# EAGLE board PT_2015_PB_MAIN_Rev2.5_order (EAGLE 6.5.0)
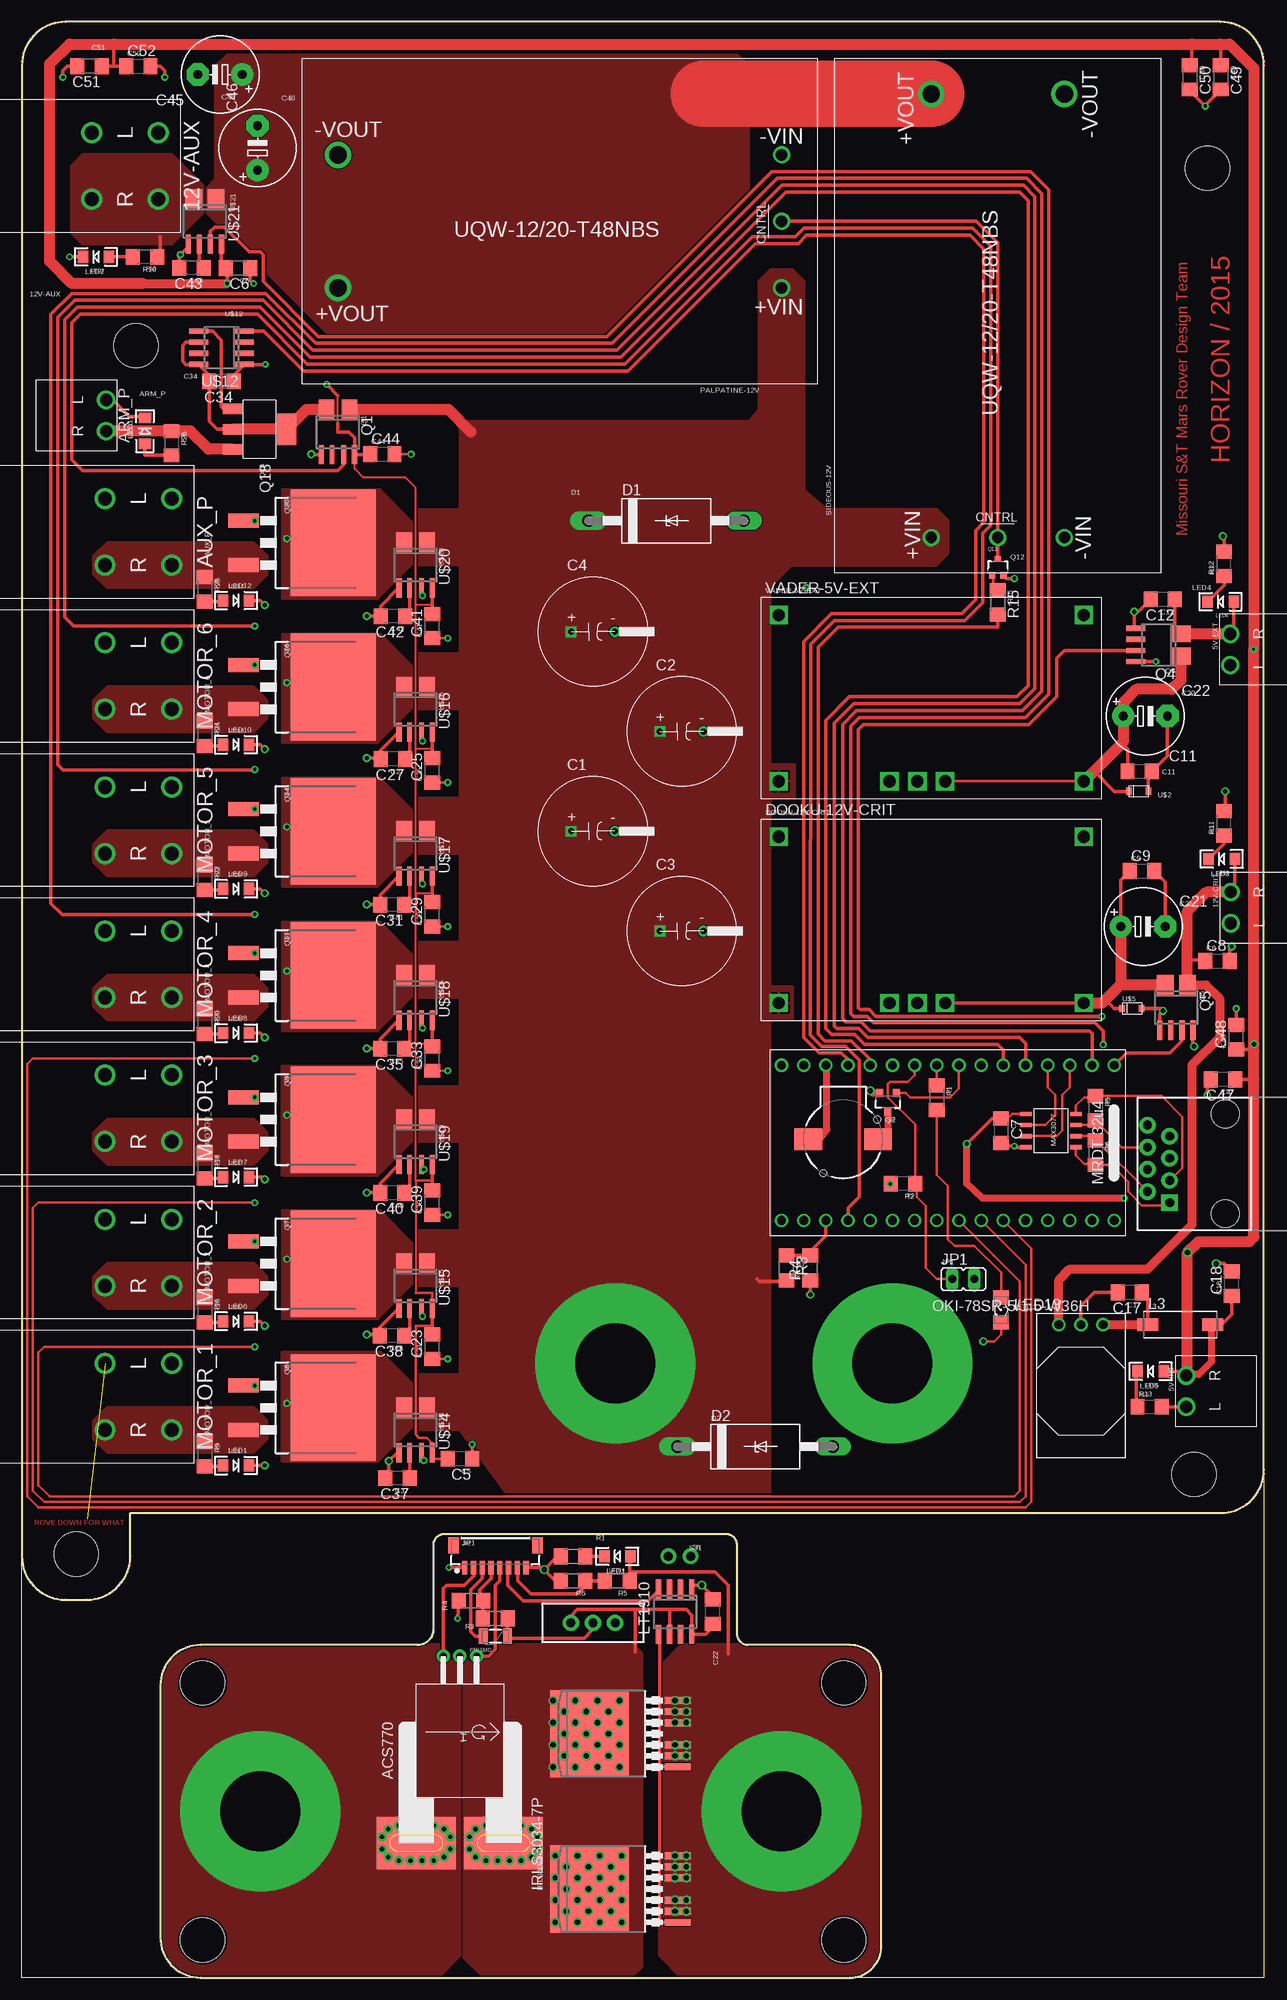
[diagram p0: board, top side]
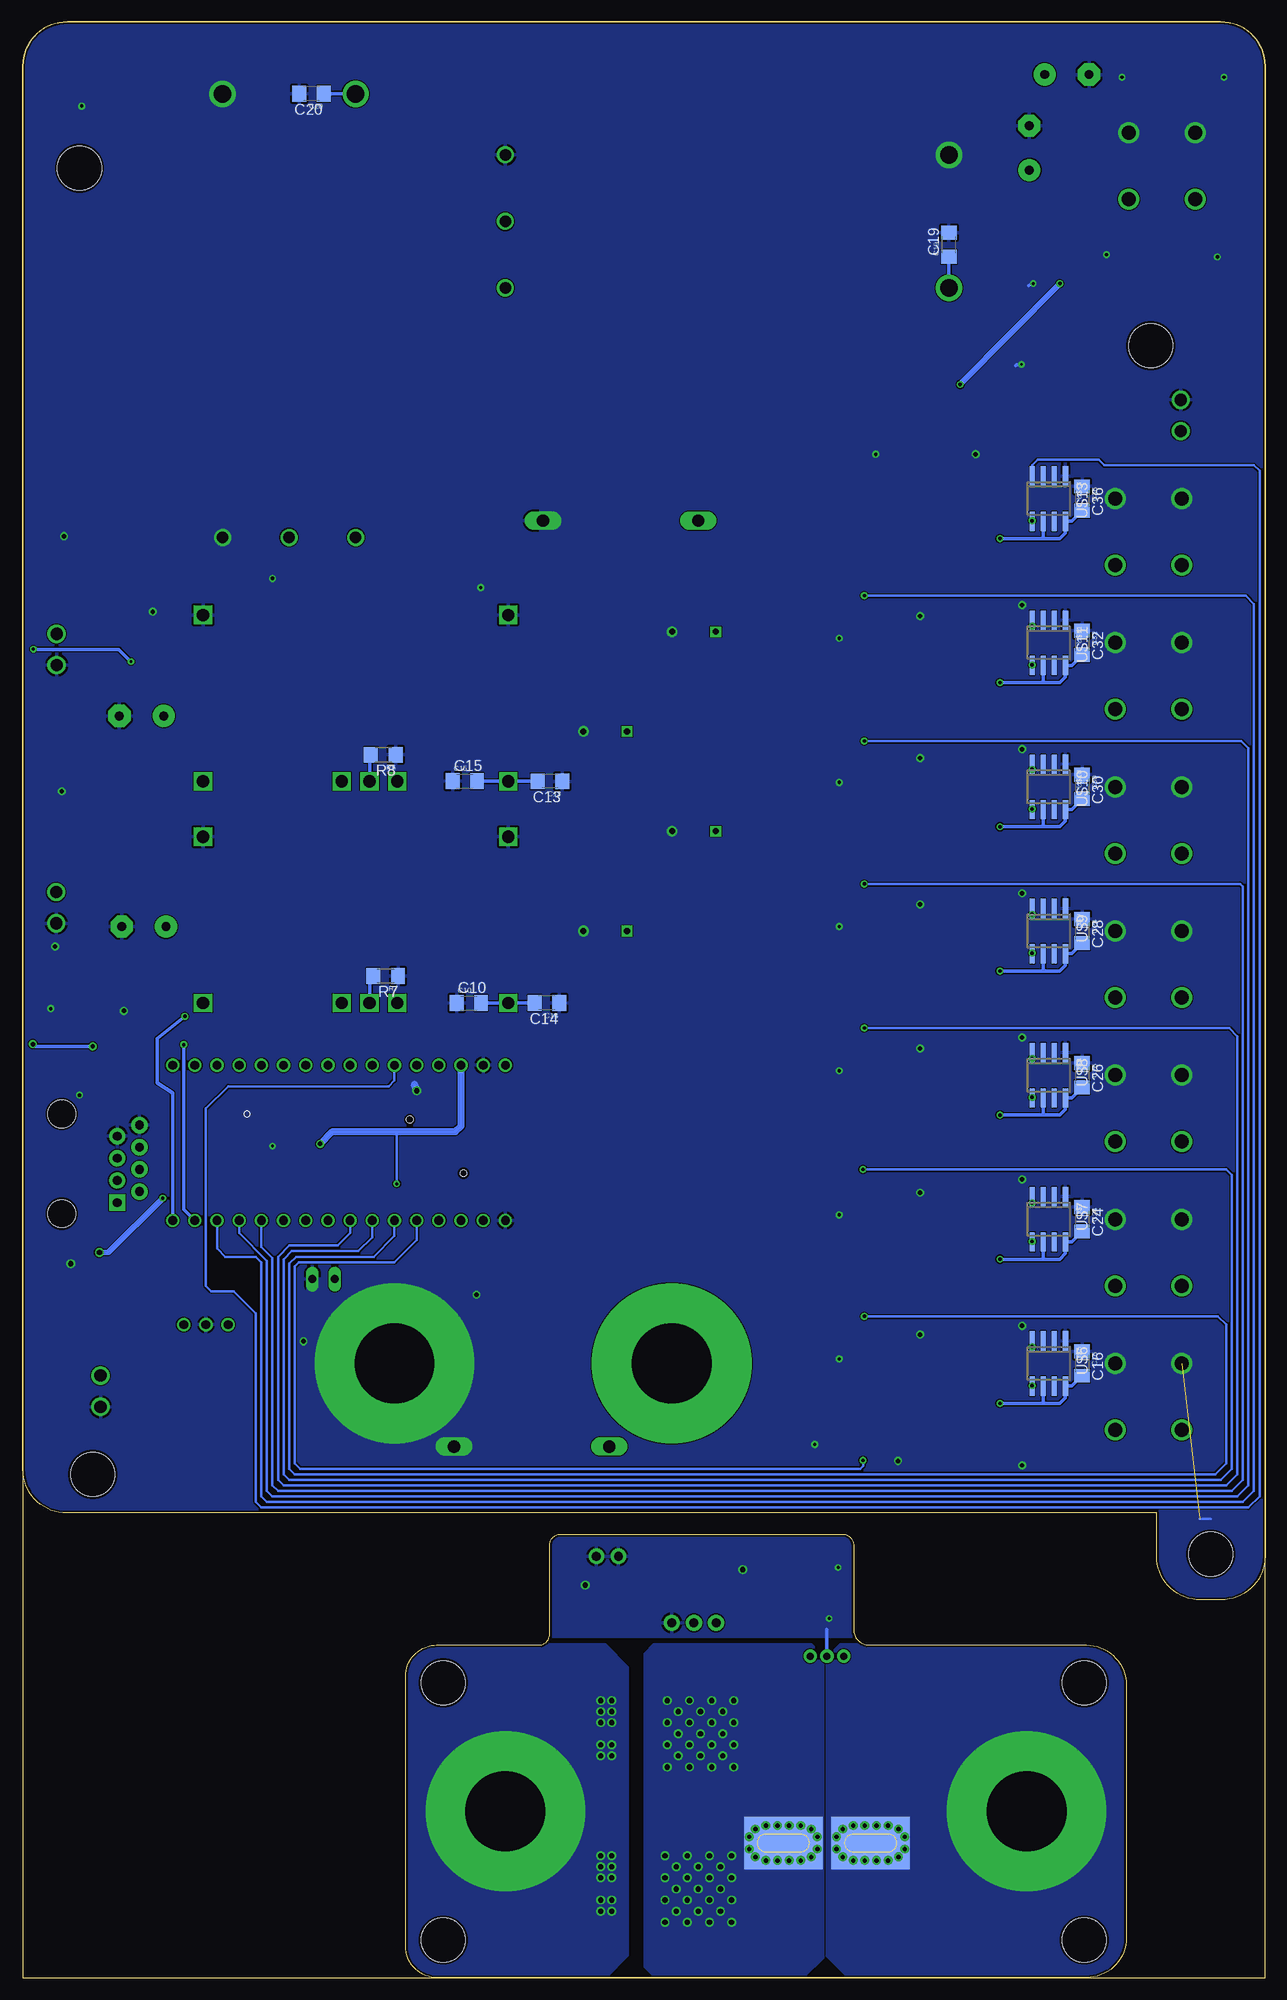
[diagram p1: board, bottom side, seen from below]

Size 142.24 x 224.03 mm. Coordinates in mm from the lower left corner, seen from the top.
Outline: 12.42,53.21 137.24,53.21 arc90 142.24,58.21 142.24,219.03 arc90 137.24,224.03 5,224.03 arc90 0,219.03 0,48.28 arc90 5,43.28 7.42,43.28 arc90 12.42,48.28 12.42,53.21
Outline: 20.45,0 94.83,0 arc90 98.43,3.59 98.43,34.51 arc90 94.83,38.1 83.19,38.1 arc-90 81.91,39.37 81.91,49.53 arc90 80.65,50.8 48.39,50.8 arc90 47.12,49.53 47.12,39.9 arc-90 45.32,38.1 20.45,38.1 arc90 15.88,33.52 15.88,4.58 arc90 20.45,0
Outline: 0,0 0,218.95 arc-90 5.08,224.03 137.16,224.03 arc-90 142.24,218.95 142.24,0 0,0
Copper layers (1*16): Top 0.035559375mm / dielectric 1.501140625mm / Bottom 0.035559375mm
Design rules "typical_4pcb *": minimum track width 5mil, minimum drill 10mil, track to track 5mil, track to pad 5mil, pad to pad 5mil, via to via 5mil, smd to smd 5mil, copper to edge 10mil, drill to drill 5mil, minimum pad ring 10mil, minimum via ring 8mil, stop-mask expansion 4mil, vias tented up to drill 0mil, thermal gap 10mil
Holes 5.08 mm at 13.08,186.94 135.76,207.26 134.24,57.66 6.22,48.51 20.7,33.78 20.7,4.32 94.11,33.78 94.11,4.32

## Footprints (pad centres in the part's own frame; a part is rotated, then mirrored left to right if it is on the bottom)
691322110002 = drill 1.4: L -1.79,0; R 1.79,0
20020618-M02 = drill 1.6: L1 -3.81,3.81; L2 -3.81,-3.81; R1 3.81,3.81; R2 3.81,-3.81
LARGE_TERMINAL_HOLE = drill 9.144 pad 18.288: P$1 0,0
C_12.5MM = drill 0.7 square: + -2.5,0 | drill 0.7: - 2.5,0
C1206 = smd 1.6 x 1.8: 1 -1.4,0; 2 1.4,0
E5-8,5 = drill 1.016 pad 2.54: + -2.54,0 | drill 1.016 pad 2.54 octagon: - 2.54,0
CB429-17 = drill 1.397 long: A 8.89,0; C -8.89,0
R_PDSS-T7 = drill 1.4 square: 1 -17.47,9.53; 2 -17.47,-9.52; 3 -4.77,-9.52; 4 -1.59,-9.52; 5 1.59,-9.52; 6 17.47,-9.52; 7 17.47,9.53
PTC-1206 = smd 1 x 1.8: 1 -1.4,0; 2 1.4,0
D2PAK-7 = smd 0.8 x 3: 1 -3.81,-9.207; 2 -2.54,-9.207; 3 -1.27,-9.207; 4 1.27,-9.207; 5 2.54,-9.207; 6 3.81,-9.207 | smd 10 x 9: PAD 0,0.895
JP1 = drill 0.914 long: 1 0,-1.27; 2 0,1.27
BM08B-SRSS-TB = smd 0.6 x 1.55: 1 -3.5,0; 2 -2.5,0; 3 -1.5,0; 4 -0.5,0; 5 0.5,0; 6 1.5,0; 7 2.5,0; 8 3.5,0 | smd 1.2 x 1.8: P$9 4.8,2.525; P$10 -4.8,2.525
L8530M = smd 2.4 x 1.4: 1 -3.7,0; 2 3.7,0
LED-1206 = smd 1.2 x 1.4: A -1.5,0; C 1.5,0
FKIT-LED-1206 = smd 1.6 x 1.803: A -1.422,0; C 1.422,0
OKI-78SRH = drill 1.016: 1 2.54,0; 2 0,0; 3 -2.54,0
U-T48-QB-NO_TRIM = drill 1.3: 1 -25.4,7.62; 2 -25.4,0; 3 -25.4,-7.62 | drill 2: 4 25.4,-7.62; 8 25.4,7.62
SOIC8_ACS711_SKETCH = smd 1.8 x 2.2: 1 -1.321,-2.6; 4 1.321,-2.6 | smd 0.6 x 2.2: 5 1.905,2.6; 8 -1.905,2.6 | smd 0.55 x 2.2: 6 0.686,2.6; 7 -0.686,2.6
SOT23-3 = smd 0.8 x 0.9: 1 -0.95,-1; 2 0.95,-1; 3 0,1.1
SOIC8_ACS711 = smd 1.92 x 2.2: 1 -1.27,-2.6; 4 1.27,-2.6 | smd 0.6 x 2.2: 5 1.905,2.6; 6 0.635,2.6; 7 -0.635,2.6; 8 -1.905,2.6
D2PACK = smd 1.6 x 3.5: 1 -2.54,-8.275; 2 2.54,-8.275 | smd 12.2 x 9.75: TAB 0,2
SOT323 = smd 0.7 x 0.7: 1 -0.65,-0.925; 2 0.65,-0.925; 3 0,0.925
SOT-223 = smd 1.2 x 2.2: 1 -2.3,-3.1; 2 0,-3.1; 3 2.3,-3.1 | smd 3.6 x 2.2: 4 0,3.1
1206 = smd 1.6 x 1.8: 1 -1.4,0; 2 1.4,0
R1206 = smd 1.6 x 1.803: 1 -1.422,0; 2 1.422,0
SWITCH-SPDT = drill 1.016 pad 1.88: 1 0,2.54; 2 0,0; 3 0,-2.54
BUZZER-CCV = smd 3.2 x 2.5: + 4,0; - -4,0 | hole 0.8: -3.9,-2.25; 2.25,3.9
PTH-JUMPER-2-NO_NO_SILK = drill 1.016 pad 1.778: 1 -1.27,0; 2 1.27,0
32U4_MCU_DIP = drill 1: 1 -8.89,19.05; 2 -8.89,16.51; 3 -8.89,13.97; 4 -8.89,11.43; 5 -8.89,8.89; 6 -8.89,6.35; 7 -8.89,3.81; 8 -8.89,1.27; 9 -8.89,-1.27; 10 -8.89,-3.81; 11 -8.89,-6.35; 12 -8.89,-8.89; 13 -8.89,-11.43; 14 -8.89,-13.97; 15 -8.89,-16.51; 16 -8.89,-19.05; 17 8.89,-19.05; 18 8.89,-16.51; 19 8.89,-13.97; 20 8.89,-11.43; 21 8.89,-8.89; 22 8.89,-6.35; 23 8.89,-3.81; 24 8.89,-1.27; 25 8.89,1.27; 26 8.89,3.81; 27 8.89,6.35; 28 8.89,8.89; 29 8.89,11.43; 30 8.89,13.97; 31 8.89,16.51; 32 8.89,19.05
SOD-323 = smd 0.63 x 0.83: 1 -1.115,0; 2 1.115,0
MAX3070E = smd 0.49 x 1.3: A -1.905,2.857; B -0.635,2.857; DI 0.635,-2.857; GND 1.905,-2.857; RO -0.635,-2.857; VCC -1.905,-2.857; Y 1.905,2.857; Z 0.635,2.857
RJ45-8 = drill 1 pad 1.88 square: 1 -4.445,6.35 | drill 1 pad 1.88: 2 -3.175,8.89; 3 -1.905,6.35; 4 -0.635,8.89; 5 0.635,6.35; 6 1.905,8.89; 7 3.175,6.35; 8 4.445,8.89 | hole 3.2: -5.715,0; 5.715,0
SO8 = smd 0.6 x 2.2: 1 -1.905,-2.6; 2 -0.635,-2.6; 3 0.635,-2.6; 4 1.905,-2.6; 5 1.905,2.6; 6 0.635,2.6; 7 -0.635,2.6; 8 -1.905,2.6
PFF_LEADFORM = drill 0.8 pad 1.5: 1 -1.91,0; 2 0,0; 3 1.91,0 | drill 0.5: 4_1 3,23.4; 4_2 4.33,23.4; 4_3 5.67,23.4; 4_4 7,23.4; 4_5 8.2,23; 4_6 8.9,22.1; 4_7 8.9,20.7; 4_8 8.2,19.8; 4_9 7,19.4; 4_10 5.67,19.4; 4_11 4.33,19.4; 4_12 3,19.4; 4_13 1.8,19.8; 4_14 1.1,20.7; 4_15 1.1,22.1; 4_16 1.8,23; 5_1 -7,23.4; 5_2 -5.67,23.4; 5_3 -4.33,23.4; 5_4 -3,23.4; 5_5 -1.8,23; 5_6 -1.1,22.1; 5_7 -1.1,20.7; 5_8 -1.8,19.8; 5_9 -3,19.4; 5_10 -4.33,19.4; 5_11 -5.67,19.4; 5_12 -7,19.4; 5_13 -8.2,19.8; 5_14 -8.9,20.7; 5_15 -8.9,22.1; 5_16 -8.2,23 | smd 9 x 6 bottom: 4_B 5,21.4; 5_B -5,21.4 | smd 9 x 6: 4_T 5,21.4; 5_T -5,21.4

## Placement (x,y rotation side)
5V-EXT  H_WR-TBL_321*0002HORIZ  [691322110002]  138.38,152.15 90 top
5V-INT  H_WR-TBL_321*0002HORIZ  [691322110002]  133.35,67.18 90 top
12V-AUX  H_20020618-M02HORIZ  [20020618-M02]  11.81,207.52 270 top
12V-CRIT  H_WR-TBL_321*0002HORIZ  [691322110002]  138.43,122.56 90 top
ARM_P  H_WR-TBL_321*0002HORIZ  [691322110002]  9.65,178.94 270 top
AUX_P  H_20020618-M02HORIZ  [20020618-M02]  13.34,165.61 270 top
BATT-NEG  TERMINAL_HOLE  [LARGE_TERMINAL_HOLE]  99.69,70.36 0 top
BATT-POS  TERMINAL_HOLE  [LARGE_TERMINAL_HOLE]  67.94,70.36 0 top
C1  1mF  [C_12.5MM]  65.41,131.32 0 top
C2  1mF  [C_12.5MM]  75.56,142.75 0 top
C3  1mF  [C_12.5MM]  75.56,119.89 0 top
C4  1mF  [C_12.5MM]  65.41,154.18 0 top
C5  .1µF  [C1206]  50.16,59.44 180 top
C6  .1µF  [C1206]  24.77,195.82 180 top
C7  1uF  [C1206]  112.14,97.03 270 top
C8  10µf  [C1206]  136.91,116.46 0 top
C9  10uF  [C1206]  128.27,126.75 0 top
C10  10µF  [C1206]  91.19,111.63 0 bottom
C11  10uF  [C1206]  128.02,138.18 0 top
C12  47µf  [C1206]  130.65,157.86 180 top
C13  1µF  [C1206]  81.89,137.03 180 bottom
C14  1µF  [C1206]  82.25,111.63 180 bottom
C15  10µF  [C1206]  91.64,137.06 0 bottom
C16  10µF  [C1206]  20.96,70.36 270 bottom
C17  47µF  [C1206]  126.87,78.49 180 top
C18  47µF  [C1206]  138.56,79.5 90 top
C19  47uF  [C1206]  36.2,198.5 90 bottom
C20  47uF  [C1206]  109.2,215.79 180 bottom
C21  330µF  [E5-8,5]  128.4,120.4 0 top
C22  330µF  [E5-8,5]  128.65,144.53 0 top
C23  .1µF  [C1206]  46.99,72.26 90 top
C24  10µF  [C1206]  20.96,86.87 270 bottom
C25  .1µF  [C1206]  46.99,138.3 90 top
C26  10µF  [C1206]  20.96,103.38 270 bottom
C27  1nF  [C1206]  42.48,139.57 180 top
C28  10µF  [C1206]  20.96,119.89 270 bottom
C29  .1µF  [C1206]  46.99,121.79 90 top
C30  10µF  [C1206]  20.96,136.4 270 bottom
C31  1nF  [C1206]  42.42,122.9 180 top
C32  10µF  [C1206]  20.96,152.91 270 bottom
C33  .1µF  [C1206]  46.99,105.28 90 top
C34  10µF  [C1206]  22.86,182.83 180 top
C35  1nF  [C1206]  42.42,106.39 180 top
C36  10µF  [C1206]  20.96,169.42 270 bottom
C37  1nF  [C1206]  43.02,57.21 180 top
C38  1nF  [C1206]  42.39,73.53 180 top
C39  .1µF  [C1206]  46.99,88.77 90 top
C40  1nF  [C1206]  42.42,89.88 180 top
C41  .1µF  [C1206]  46.99,154.81 90 top
C42  1nF  [C1206]  42.48,155.92 180 top
C43  1nF  [C1206]  19.43,195.83 180 top
C44  .1µF  [C1206]  41.27,174.5 0 top
C45  330µF  [E5-8,5]  22.7,218 180 top
C46  330µF  [E5-8,5]  26.99,209.58 90 top
C47  1nF  [C1206]  137.54,102.87 180 top
C48  10uF  [C1206]  139.06,107.7 90 top
C49  1nF  [C1206]  137.29,217.68 270 top
C50  10uF  [C1206]  133.73,217.68 270 top
C51  1nF  [C1206]  7.75,218.95 180 top
C52  10uF  [C1206]  13.34,218.95 0 top
C53  10µF  [C1206]  79.12,41.91 90 top
D1  1.5KE36A  [CB429-17]  73.79,166.88 0 top
D2  1.5KE36A  [CB429-17]  83.98,60.83 0 top
DOOKU-12V-CRIT  Q_PTN78020WAH  [R_PDSS-T7]  104.14,121.16 0 top
F1  PTCSMD  [PTC-1206]  54.23,39.12 180 top
IRLS3034-7P  [D2PAK-7]  65.91,10.16 90 top
IRLS3034-7P.2  [D2PAK-7]  65.91,27.94 90 top
JP1  [JP1]  107.82,80.01 270 top
JP2  [BM08B-SRSS-TB]  54.23,46.99 0 top
L3  [L8530M]  132.66,74.8 0 top
LED1  [LED-1206]  24.51,58.67 0 top
LED2  [LED-1206]  8.51,197.1 180 top
LED3  [LED-1206]  137.41,128.14 180 top
LED4  [LED-1206]  137.29,157.61 180 top
LED5  [LED-1206]  129.29,69.47 180 top
LED6  [LED-1206]  24.51,75.18 0 top
LED7  [LED-1206]  24.51,91.69 0 top
LED8  [LED-1206]  24.51,108.2 0 top
LED9  [LED-1206]  24.51,124.71 0 top
LED10  [LED-1206]  24.51,141.22 0 top
LED11  [LED-1206]  14.1,177.17 90 top
LED12  [LED-1206]  24.51,157.73 0 top
LED13  [FKIT-LED-1206]  112.14,76.49 270 top
LED14  [LED-1206]  68.2,48.26 180 top
MOTOR_1  H_20020618-M02HORIZ  [20020618-M02]  13.34,66.55 270 top
MOTOR_2  H_20020618-M02HORIZ  [20020618-M02]  13.34,83.06 270 top
MOTOR_3  H_20020618-M02HORIZ  [20020618-M02]  13.34,99.57 270 top
MOTOR_4  H_20020618-M02HORIZ  [20020618-M02]  13.34,116.08 270 top
MOTOR_5  H_20020618-M02HORIZ  [20020618-M02]  13.34,132.59 270 top
MOTOR_6  H_20020618-M02HORIZ  [20020618-M02]  13.34,149.1 270 top
OKI-78SR-5/1.5-W36H  Q_OKI-78SR  [OKI-78SRH]  121.28,74.8 180 top
PALPATINE-12V  UQW-12/20-T48NBS  [U-T48-QB-NO_TRIM]  61.59,201.17 180 top
Q1  Q_ACS711LC_SKETCH  [SOIC8_ACS711_SKETCH]  36.2,177.04 180 top
Q2  200mA/50V  [SOT23-3]  99.19,100.33 180 top
Q4  Q_ACS711LC  [SOIC8_ACS711]  130.18,152.65 90 top
Q5  Q_ACS711LC  [SOIC8_ACS711]  132.21,111.12 180 top
Q6  Q_IRFS7437PbF  [D2PACK]  33.66,65.28 270 top
Q7  Q_IRFS7437PbF  [D2PACK]  33.66,81.79 270 top
Q9  Q_IRFS7437PbF  [D2PACK]  33.66,98.3 270 top
Q11  Q_IRFS7437PbF  [D2PACK]  33.66,114.81 270 top
Q12  2N7002  [SOT323]  111.76,161.54 0 top
Q14  Q_IRFS7437PbF  [D2PACK]  33.66,131.32 270 top
Q16  Q_IRFS7437PbF  [D2PACK]  33.66,147.83 270 top
Q18  Q_FDT86102LZ  [SOT-223]  27.23,177.37 270 top
Q20  Q_IRFS7437PbF  [D2PACK]  33.66,164.34 270 top
R1  1k Ohm  [1206]  104.78,100.81 270 top
R2  10k Ohm  [1206]  100.9,90.93 180 top
R3  60kΩ  [R1206]  87.55,81.28 270 top
R4  10kΩ  [R1206]  90.3,81.28 90 top
R5  120 Ohm  [1206]  122.94,99.57 270 top
R6  120 Ohm  [1206]  122.94,94.49 270 top
R7  590Ω  [R1206]  100.71,114.74 180 bottom
R8  21kΩ  [R1206]  100.97,140.08 180 bottom
R9  5kΩ  [1206]  20.96,59.94 270 top
R10  1kΩ  [1206]  14.1,197.1 180 top
R11  1kΩ  [1206]  137.67,132.21 90 top
R12  330  [1206]  137.67,161.96 90 top
R13  330  [1206]  129.16,65.41 0 top
R14  60kΩ  [R1206]  68.2,45.47 180 top
R15  1k  [R1206]  111.76,157.54 270 top
R16  5kΩ  [1206]  20.96,76.45 270 top
R17  10kΩ  [R1206]  63.12,45.47 180 top
R18  5kΩ  [1206]  20.96,92.96 270 top
R19  60kΩ  [R1206]  54.23,41.15 0 top
R20  5kΩ  [1206]  20.96,109.47 270 top
R21  10kΩ  [R1206]  51.44,43.18 0 top
R22  5kΩ  [1206]  20.96,125.98 270 top
R23  5kΩ  [R1206]  63.12,48.26 180 top
R24  5kΩ  [1206]  20.96,142.49 270 top
R26  5kΩ  [1206]  17.14,175.77 270 top
R28  5kΩ  [1206]  20.96,159 270 top
S1  [SWITCH-SPDT]  65.41,40.64 90 top
SG1  BUZZERSMD2  [BUZZER-CCV]  94.04,96.04 180 top
SIDEOUS-12V  UQW-12/20-T48NBS  [U-T48-QB-NO_TRIM]  111.76,190.37 90 top
SJ1  GROUND TIE  [PTH-JUMPER-2-NO_NO_SILK]  75.31,48.26 180 top
U$1  32U4_BREAKOUT  [32U4_MCU_DIP]  106.04,95.63 270 top
U$2  D_SD12T1G  [SOD-323]  127.89,135.89 0 top
U$3  MAX3077  [MAX3070E]  117.86,97.03 270 top
U$4  RJ45-8PTH  [RJ45-8]  137.79,93.22 90 top
U$5  D_SD12T1G  [SOD-323]  127.13,111 0 top
U$6  LT1910  [SO8]  24.77,70.36 180 bottom
U$7  LT1910  [SO8]  24.77,86.87 180 bottom
U$8  LT1910  [SO8]  24.77,103.38 180 bottom
U$9  LT1910  [SO8]  24.77,119.89 180 bottom
U$10  LT1910  [SO8]  24.77,136.4 180 bottom
U$11  LT1910  [SO8]  24.77,152.91 180 bottom
U$12  LT1910  [SO8]  22.86,186.69 90 top
U$13  LT1910  [SO8]  24.77,169.42 180 bottom
U$14  ACS714LLCTR-50A-T  [SOIC8_ACS711_SKETCH]  45.09,62.74 180 top
U$15  ACS714LLCTR-50A-T  [SOIC8_ACS711_SKETCH]  45.09,79.25 180 top
U$16  ACS714LLCTR-50A-T  [SOIC8_ACS711_SKETCH]  45.09,145.29 180 top
U$17  ACS714LLCTR-50A-T  [SOIC8_ACS711_SKETCH]  45.09,128.78 180 top
U$18  ACS714LLCTR-50A-T  [SOIC8_ACS711_SKETCH]  45.09,112.27 180 top
U$19  ACS714LLCTR-50A-T  [SOIC8_ACS711_SKETCH]  45.09,95.76 180 top
U$20  ACS714LLCTR-50A-T  [SOIC8_ACS711_SKETCH]  45.09,161.8 180 top
U$21  ACS714LLCTR-50A-T  [SOIC8_ACS711]  20.96,201.17 180 top
U$22  TEST  [TEST]  107.06,153.42 0 top
U$23  ACS770  [PFF_LEADFORM]  50.16,36.83 180 top
U$24  LT1910  [SO8]  74.8,41.91 180 top
V_ARRAY  TERMINAL_HOLE  [LARGE_TERMINAL_HOLE]  27.3,19.05 0 top
V_OUT  TERMINAL_HOLE  [LARGE_TERMINAL_HOLE]  87,19.05 0 top
VADER-5V-EXT  Q_PTN78020WAH  [R_PDSS-T7]  104.14,146.56 0 top

## Library data of the parts
5V-EXT 5V-INT 12V-CRIT ARM_P = MRDT-2015-PowerBoard; DIGIKEY_PN: 732-2769-ND
12V-AUX AUX_P MOTOR_1-MOTOR_6 = MRDT-2015-PowerBoard; DIGIKEY_PN: 609-3951-ND
BATT-NEG BATT-POS DOOKU-12V-CRIT OKI-78SR-5/1.5-W36H PALPATINE-12V Q1 Q4-Q7 Q9 Q11 Q14 Q16 Q18 Q20 SIDEOUS-12V U$14-U$21 U$24 V_ARRAY V_OUT VADER-5V-EXT = MRDT-2015-PowerBoard
C1-C4 U$2 U$5 = MRDT-2014-All
C5-C53 L3 R3 R4 R7 R8 R14 R15 R17 R19 R21 R23 = resistor
D1 D2 = diode
F1 = SparkFun-PowerIC; PROD_ID: RES-11150
IRLS3034-7P IRLS3034-7P.2 U$23 = MRDT-2015-BMS
JP1 = jumper
JP2 U$4 = SparkFun-Connectors
LED1-LED14 = SparkFun-LED
Q2 = SparkFun-DiscreteSemi; PROD_ID: TRANS-00830
Q12 = SparkFun-DiscreteSemi; PROD_ID: TRANS-11151
R1 R2 R5 R6 R9-R13 R16 R18 R20 R22 R24 R26 R28 SJ1 = SparkFun-Passives
S1 SG1 = SparkFun-Electromechanical
U$1 U$22 = MRDT-2015-General
U$3 = MAX3077
U$6-U$13 = Jake

## Nets
5V: JP2.5 U$23.1
5V-EXT: 5V-EXT.R C12.1 LED4.A Q4.4
5V-IMEAS: Q4.7 U$1.32
12V-AUX: 12V-AUX.R1 12V-AUX.R2 R10.1 U$21.4
12V-CRIT: 12V-CRIT.R C8.1 LED3.A OKI-78SR-5/1.5-W36H.1 Q5.1
12V-IMEAS: U$1.31 U$21.7
12V-SIG: R15.2 U$1.12
+5V: 5V-INT.R C5.2 C6.2 C7.1 C18.1 C23.2 C25.2 C29.2 C33.2 C39.2 C41.2 C44.1 C47.1 C48.1 C49.1 C50.1 C51.1 C52.1 L3.2 LED5.A Q1.8 Q4.8 Q5.8 R2.2 SG1.+ U$1.14 U$3.VCC U$14.8 U$15.8 U$16.8 U$17.8 U$18.8 U$19.8 U$20.8 U$21.8
ARM_P-IMEAS: Q1.7 U$1.20
ARM_P-SIG: U$1.13 U$12.4
AUX_P-IMEAS: U$1.30 U$20.7
AUX_P-SIG: U$1.11 U$13.4
BUZZ_BUZZ_MOTHERFUCKER: Q2.1 U$1.8
CRIT-IMEAS: Q5.7 U$1.1
GATE: JP2.6 U$24.4
GND: 5V-EXT.L 5V-INT.L 12V-AUX.L1 12V-AUX.L2 12V-CRIT.L ARM_P.L AUX_P.L1 AUX_P.L2 BATT-NEG.P$1 C1.- C2.- C3.- C4.- C5.1 C6.1 C7.2 C8.2 C9.2 C10.1 C11.2 C12.2 C13.1 C14.1 C15.1 C16.1 C17.2 C18.2 C19.2 C20.2 C21.- C22.- C23.1 C24.1 C25.1 C26.1 C27.2 C28.1 C29.1 C30.1 C31.2 C32.1 C33.1 C34.1 C35.2 C36.1 C37.2 C38.2 C39.1 C40.2 C41.1 C42.2 C43.2 C44.2 C45.- C46.- C47.2 C48.2 C49.2 C50.2 C51.2 C52.2 D1.A D2.A DOOKU-12V-CRIT.1 DOOKU-12V-CRIT.7 JP1.2 LED1.C LED2.C LED6.C LED7.C LED8.C LED9.C LED10.C LED11.C LED12.C LED13.C MOTOR_1.L1 MOTOR_1.L2 MOTOR_2.L1 MOTOR_2.L2 MOTOR_3.L1 MOTOR_3.L2 MOTOR_4.L1 MOTOR_4.L2 MOTOR_5.L1 MOTOR_5.L2 MOTOR_6.L1 MOTOR_6.L2 OKI-78SR-5/1.5-W36H.2 PALPATINE-12V.3 PALPATINE-12V.4 Q1.5 Q2.2 Q4.5 Q5.5 Q12.2 R4.1 R7.1 R8.1 R11.2 R12.2 R13.2 SIDEOUS-12V.3 SIDEOUS-12V.4 U$1.15 U$1.17 U$2.2 U$3.GND U$4.7 U$4.8 U$5.2 U$6.1 U$7.1 U$8.1 U$9.1 U$10.1 U$11.1 U$12.1 U$13.1 U$14.5 U$15.5 U$16.5 U$17.5 U$18.5 U$19.5 U$20.5 U$21.5 VADER-5V-EXT.1 VADER-5V-EXT.7
GND1: C53.2 JP2.1 JP2.8 R17.2 R21.1 R23.2 S1.3 SJ1.1 SJ1.2 U$23.2 U$24.1
I_ARRAY: JP2.2 U$23.3
INFO_LED: R1.1 U$1.9
JUMPER_SIG_IN: JP1.1 R2.1 U$1.10
LOGIC_POWER: F1.2 JP2.3
M1-IMEAS: U$1.21 U$14.7
M1-SIG: U$1.25 U$6.4
M2-IMEAS: U$1.22 U$15.7
M2-SIG: U$1.26 U$7.4
M3-IMEAS: U$1.23 U$19.7
M3-SIG: U$1.27 U$8.4
M4-IMEAS: U$1.24 U$18.7
M4-SIG: U$1.2 U$9.4
M5-IMEAS: U$1.28 U$17.7
M5-SIG: U$1.5 U$10.4
M6-IMEAS: U$1.29 U$16.7
M6-SIG: U$1.6 U$11.4
N$1: C37.1 U$14.6
N$2: C38.1 U$15.6
N$3: LED3.C R11.1
N$4: PALPATINE-12V.2 Q12.3 SIDEOUS-12V.2
N$5: LED4.C R12.1
N$6: LED5.C R13.1
N$7: C19.1 C20.1 C45.+ C46.+ PALPATINE-12V.8 SIDEOUS-12V.8 U$21.1
N$8: Q2.3 SG1.-
N$9: DOOKU-12V-CRIT.4 R7.2
N$10: IRLS3034-7P.2 IRLS3034-7P.2.2 IRLS3034-7P.2.3 IRLS3034-7P.2.4 IRLS3034-7P.2.5 IRLS3034-7P.2.6 IRLS3034-7P.3 IRLS3034-7P.4 IRLS3034-7P.5 IRLS3034-7P.6 LED14.A R14.1 V_OUT.P$1
N$11: LED13.A R1.2
N$12: C43.1 U$21.6
N$14: R6.2 U$3.Y U$4.1
N$15: IRLS3034-7P.1 IRLS3034-7P.2.1 U$24.5
N$16: C11.1 C22.+ Q4.1 U$2.1 VADER-5V-EXT.5 VADER-5V-EXT.6
N$17: C27.1 U$16.6
N$18: R6.1 U$3.Z U$4.2
N$19: R5.2 U$3.B U$4.6
N$20: R5.1 U$3.A U$4.3
N$21: U$1.3 U$3.DI
N$22: C31.1 U$17.6
N$23: C35.1 U$18.6
N$24: C40.1 U$19.6
N$25: C42.1 U$20.6
N$28: C24.2 Q7.TAB U$7.6 U$7.8 U$15.4
N$29: MOTOR_2.R1 MOTOR_2.R2 Q7.2 R16.1
N$30: Q7.1 U$7.5
N$31: LED6.A R16.2
N$32: C53.1 IRLS3034-7P.2.PAD IRLS3034-7P.PAD S1.1 U$23.5_1 U$23.5_2 U$23.5_3 U$23.5_4 U$23.5_5 U$23.5_6 U$23.5_7 U$23.5_8 U$23.5_9 U$23.5_10 U$23.5_11 U$23.5_12 U$23.5_13 U$23.5_14 U$23.5_15 U$23.5_16 U$23.5_B U$23.5_T U$24.6 U$24.8
N$33: U$23.4_1 U$23.4_2 U$23.4_3 U$23.4_4 U$23.4_5 U$23.4_6 U$23.4_7 U$23.4_8 U$23.4_9 U$23.4_10 U$23.4_11 U$23.4_12 U$23.4_13 U$23.4_14 U$23.4_15 U$23.4_16 U$23.4_B U$23.4_T V_ARRAY.P$1
N$34: F1.1 R19.2 S1.2
N$35: R8.2 VADER-5V-EXT.4
N$36: C9.1 C21.+ DOOKU-12V-CRIT.5 DOOKU-12V-CRIT.6 Q5.4 U$5.1
N$37: LED14.C R23.1
N$39: LED1.A R9.2
N$40: C16.2 Q6.TAB U$6.6 U$6.8 U$14.4
N$41: MOTOR_1.R1 MOTOR_1.R2 Q6.2 R9.1
N$42: Q6.1 U$6.5
N$44: C26.2 Q9.TAB U$8.6 U$8.8 U$19.4
N$45: MOTOR_3.R1 MOTOR_3.R2 Q9.2 R18.1
N$46: LED2.A R10.2
N$47: Q9.1 U$8.5
N$49: LED7.A R18.2
N$54: C28.2 Q11.TAB U$9.6 U$9.8 U$18.4
N$56: Q11.1 U$9.5
N$57: LED8.A R20.2
N$60: C30.2 Q14.TAB U$10.6 U$10.8 U$17.4
N$61: MOTOR_5.R1 MOTOR_5.R2 Q14.2 R22.1
N$62: Q14.1 U$10.5
N$63: LED9.A R22.2
N$66: C32.2 Q16.TAB U$11.6 U$11.8 U$16.4
N$67: MOTOR_6.R1 MOTOR_6.R2 Q16.2 R24.1
N$68: Q16.1 U$11.5
N$69: LED10.A R24.2
N$72: C34.2 Q1.4 Q18.2 Q18.4 U$12.6 U$12.8
N$73: ARM_P.R Q18.3 R26.1
N$74: Q18.1 U$12.5
N$75: LED11.A R26.2
N$78: C36.2 Q20.TAB U$13.6 U$13.8 U$20.4
N$79: AUX_P.R1 AUX_P.R2 Q20.2 R28.1
N$80: Q20.1 U$13.5
N$81: LED12.A R28.2
N$100: C17.1 L3.1 OKI-78SR-5/1.5-W36H.3
N$114: Q12.1 R15.1
PRIMARY-VMEAS: R3.1 R4.2 U$1.19
RXD: U$1.4 U$3.RO
U: MOTOR_4.R1 MOTOR_4.R2 Q11.2 R20.1
V_BATT: BATT-POS.P$1 C1.+ C2.+ C3.+ C4.+ C10.2 C13.2 C14.2 C15.2 D1.C D2.C DOOKU-12V-CRIT.2 PALPATINE-12V.1 Q1.1 R3.2 SIDEOUS-12V.1 U$14.1 U$15.1 U$16.1 U$17.1 U$18.1 U$19.1 U$20.1 VADER-5V-EXT.2
V_CHECK: JP2.4 R19.1 R21.2
V_OUT: JP2.7 R14.2 R17.1

## Tracks (layer width: path | path; a pad name or v marks a point on that pad's centre or on a via)
5V
  Top 0.406: JP2.5 54.73,45.46 54.23,44.96 54.23,37.59 53.47,36.83 U$23.1
5V-EXT
  Top 0.406: LED4.A 138.79,154.34 5V-EXT.R | C12.1 132.05,154.65 Q4.4
  Top 1.27: Q4.4 132.79,153.94 5V-EXT.R
5V-IMEAS  (via drill 0.38)
  Top 0.406: v123.7,110.11 97.79,110.11 97.03,110.87 96.01,110.87 95.79,111.09 95.79,142.97 96.33,143.51 115.28,143.51 118.49,146.72 118.49,151.13 119.38,152.02 Q4.7
  Bottom 0.406: U$1.32 125.09,101.35 126.87,102.49 126.87,107.57 v123.7,110.11
12V-AUX
  Top 0.406: R10.1 15.88,196.85 15.88,199.39
  pour Top (rank 2, no thermals): 20.7,205.23 20.7,202.18 17.14,198.63 6.99,198.63 5.71,199.9 5.71,207.52 6.99,208.79 17.14,208.79
12V-CRIT
  Top 0.406: C8.1 135.38,116.59 133.48,116.59 | LED3.A 138.91,124.83 12V-CRIT.R
  Top 1.016: OKI-78SR-5/1.5-W36H.1 118.75,79.88 120.01,81.15 128.91,81.15 133.98,86.23 133.98,104.52 137.16,107.7 137.16,112.14 135.58,113.72 Q5.1
  Top 1.27: Q5.1 133.48,116.59 133.48,122.17 135.65,124.34 12V-CRIT.R
12V-IMEAS  (via drill 0.38)
  Top 0.406: v123.82,106.87 123.82,108.46 122.87,109.41 97.47,109.41 96.8,110.08 95.28,110.08 94.93,110.43 94.93,143.38 95.88,144.34 114.9,144.34 117.6,147.03 117.6,204.82 115.54,206.88 87.5,206.88 86.36,206.88 85.88,206.88 66.99,187.99 33.97,187.99 27.62,194.34 27.62,197.36 27.3,197.68 26.04,197.68 23.18,200.53 22.07,200.53 21.59,200.06 U$21.7
  Bottom 0.406: U$1.31 123.82,88.01 v123.82,106.87
12V-SIG
  Top 0.406: R15.2 111.74,156.41 111.74,154.69 93.47,154.69 91.19,152.4 91.19,108.1 91.97,107.31 95,107.31 97.16,105.16 U$1.12
+5V  (via drill 0.33, 0.38, 0.5, 0.6)
  Top 0.254: 45.09,106.93 45.09,91.31 45.09,78.45 | 45.09,106.93 45.09,121.79 | 45.09,140.72 45.09,124.21 46.99,124.21 | 45.09,140.72 45.09,157.23 | 45.09,157.23 45.09,170.69 43.94,171.83 39.12,171.83 38.1,172.85 38.1,173.74 | 46.99,106.93 45.09,106.93 | 46.99,140.72 45.09,140.72 | 46.99,157.23 45.09,157.23 | 36.2,178.05 36.2,181.23
  Top 0.279: C7.1 112.91,98.43 113.41,98.93 U$3.VCC | 45.09,121.79 45.09,124.21
  Top 0.305: 46.99,59.43 C5.2 | U$19.8 46.99,91.31 45.09,91.31 | C29.2 46.99,124.21 | C25.2 46.99,140.72 | U$20.8 46.99,157.23 | C23.2 46.99,74.68 45.09,74.68 45.09,62.23 45.47,61.85 46.35,61.85 46.99,61.21 | 38.1,173.74 Q1.8 38.1,175.26 | 23.5,195.32 C6.2 | 45.09,78.45 46.99,78.45 U$15.8 | 99.69,91.13 R2.2 v99.44,90.93
  Top 0.406: C23.2 U$15.8 | U$19.8 C39.2 | U$18.8 46.99,106.93 C33.2 | U$17.8 C29.2 | U$16.8 C25.2 | U$20.8 C41.2 | U$21.8 22.86,195.96 C6.2 | Q1.8 39.81,174.44 C44.1 | 5V-INT.R 132.83,68.97 132.33,69.47 LED5.A | C7.1 111.13,98.43 v108.2,95.5 | 36.2,181.23 v34.92,182.5 | v23.5,194.06 23.5,195.32 | 38.1,175.26 38.1,176.4 37.47,177.04 36.2,177.04 36.2,178.05 | 46.99,61.21 U$14.8 46.99,59.43 46.99,59.31 | C18.1 138.56,75.95 137.54,74.93 136.48,74.93 L3.2 | Q4.8 v129.87,150.75 | C47.1 141.1,102.87 | C48.1 141.1,106.3 141.1,106.17 | C49.1 137.29,221.49 | C50.1 133.98,219.08 133.98,221.49 | C52.1 C51.1 10.54,218.95 10.54,221.49 | Q5.8 134.11,106.81 v134.24,106.68 | 14.1,194.06 13.84,194.06
  Top 0.813: v126.24,89.28 110.01,89.28 108.2,90.96 v108.2,95.5 | L3.2 136.27,74.72 136.27,70.61 134.75,69.09 133.48,69.09 133.47,69.09 5V-INT.R | SG1.+ 91.34,96.04 92.2,97.16 92.2,104.39 U$1.14
  Top 1.016: 14.1,194.06 v23.5,194.06
  Top 1.27: 133.48,69.09 v133.48,83.06 134.75,84.33 140.59,84.33 141.1,84.84 141.1,102.87 141.1,106.17 v141.1,106.93 141.1,152.12 | 141.1,152.12 v141.05,152.17 | 141.1,152.12 141.1,218.69 138.3,221.49 137.29,221.49 133.98,221.49 10.54,221.49 5.46,221.49 3.18,219.2 3.18,196.6 5.74,194.06 13.84,194.06
  Bottom 0.305: 106.81,96.9 99.82,96.9 99.44,96.52 v99.44,90.93
  Bottom 0.406: v141.05,152.17 141.1,152.17 141.1,152.15 131.27,152.15 v129.87,150.75 | v134.24,106.68 140.84,106.68 v141.1,106.93
  Bottom 0.61: v34.92,182.5 v23.5,194.06 | v126.24,89.28 132.46,83.06 v133.48,83.06
  Bottom 0.813: v108.2,95.5 106.81,96.9 92.71,96.9 92.07,97.54 U$1.14 | 133.48,69.09 133.47,69.09 5V-INT.R
ARM_P-IMEAS
  Top 0.406: Q1.7 36.83,173.23 36.2,172.59 6.99,172.59 5.71,173.86 5.71,189.58 6.67,190.53 26.99,190.53 32.7,184.82 69.06,184.82 83.66,199.42 88.58,199.42 89.53,200.37 108.9,200.37 110.97,198.31 110.97,166.4 110.01,165.45 110.01,157.51 107.95,155.45 93.03,155.45 90.33,152.75 90.3,107.95 91.59,106.66 94.35,106.66 95.88,105.12 95.88,89.41 94.62,88.14 U$1.20
ARM_P-SIG
  Top 0.406: U$1.13 94.62,105.16 93.85,105.92 91.31,105.92 89.53,107.7 89.53,153.07 92.71,156.24 107.63,156.24 109.22,157.83 109.22,165.77 110.17,166.72 110.17,197.99 108.59,199.58 89.85,199.58 88.9,198.63 83.98,198.63 69.37,184.02 32.26,184.02 27.69,188.6 U$12.4
AUX_P-IMEAS  (via drill 0.38)
  Top 0.305: U$20.7 45.88,159.04 v45.88,158.31
  Bottom 0.305: v45.88,158.31 2.22,158.31 1.27,157.35 1.27,55.75 2.54,54.48 114.3,54.48 114.94,55.12 114.94,81.95 115.57,82.58 119.06,82.58 120.01,83.53 U$1.30
AUX_P-SIG
  Bottom 0.305: U$13.4 26.67,173.23 26.04,173.86 19.05,173.86 18.41,173.23 1.27,173.23 0.64,172.59 0.64,55.12 1.91,53.85 114.94,53.85 115.57,54.48 115.57,76.07 118.11,78.61 120.65,78.61 121.28,79.25 121.28,99.57 118.75,102.11 100.33,102.11 99.69,102.74 U$1.11
BUZZ_BUZZ_MOTHERFUCKER
  Top 0.305: U$1.8 107.31,101.85 106.3,100.84 101.73,100.84 101.22,101.35 100.15,101.35 Q2.1
CRIT-IMEAS
  Top 0.406: U$1.1 126.52,105.92 131.44,105.92 132.84,107.31 Q5.7
GATE
  Top 0.406: U$24.4 72.84,44.96 72.84,44.26 71.75,43.18 57.43,43.18 55.65,44.96 55.65,46.4 JP2.6
GND  (via drill 0.33, 0.38, 0.5, 0.6)  (1 unrouted)
  Top 0.305: C25.1 v48.77,136.91 | v48.77,120.4 C29.1 | C33.1 v48.77,103.89 | C39.1 v48.77,87.38 | C23.1 v48.77,70.87 | C41.1 v48.77,153.42 | C44.2 v44.58,174.5 | LED13.C 112.14,73.66 111.38,72.9 v110.11,72.9
  Top 0.406: v51.56,61.09 C5.1 | U$14.5 42.99,60.14 v42.04,59.18 42.04,57.63 C37.2 | v39.5,73.66 40.86,73.66 C38.2 40.99,74.45 U$15.5 | v39.5,89.92 40.99,89.92 C40.2 41.02,91 U$19.5 | U$18.5 41.02,107.51 C35.2 40.99,106.43 v39.5,106.43 | v39.5,122.94 40.99,122.94 C31.2 41.02,124.02 U$17.5 | v39.5,139.7 40.95,139.7 C27.2 41.08,140.59 U$16.5 | U$20.5 41.08,157.1 C42.2 41.05,155.96 v39.5,155.96 | Q1.5 33.21,174.44 v33.15,174.5 | LED2.C v5.46,197.1 | OKI-78SR-5/1.5-W36H.2 121.28,76.96 122.81,78.49 C17.2 | v90.3,78.23 R4.1 | U$3.GND 113.79,95.12 v113.66,95.25 112.52,95.25 C7.2 | ARM_P.L 10.4,180.73 12.32,178.82 13.95,178.82 LED11.C | R13.2 130.57,65.39 5V-INT.L | Q12.2 112.75,160.27 v113.66,160.27 | Q5.5 130.3,110.36 v130.68,110.74 130.43,111 U$5.2 | C18.2 137.67,81.79 v136.78,81.79 | v138.56,118.11 138.31,118.36 C8.2 | C9.2 130.94,125.48 C21.- | C22.- 131.19,139.95 C11.2 129,137.76 U$2.2 | v137.79,135.89 137.79,133.73 R11.2 | C47.2 135.76,102.87 v135.76,101.09 | C48.2 v139.06,111 | R12.2 137.67,164.97 v137.54,165.1 | C12.2 127.85,156.46 v127.38,156.46 127.38,154.75 Q4.5 | C50.2 133.73,216.15 v135.51,214.38 135.51,214.5 C49.2 | v16.38,217.68 16.38,218.44 15.88,218.95 C52.2 | v4.7,217.68 4.7,218.44 5.21,218.95 C51.2 | LED7.C 27.56,91.69 v27.81,91.44 | LED8.C 27.3,108.2 v27.81,107.7 | LED9.C 27.3,124.71 v27.81,124.21 | LED10.C 27.3,141.22 v27.81,140.72 | LED12.C 27.3,157.73 v27.81,157.23 | LED1.C v27.81,58.67 | LED6.C 27.3,75.18 v27.81,74.68 | C6.1 26.16,194.43 v26.54,194.06 | U$21.5 19.05,198.25 v18.16,197.36 18.03,197.1 C43.2 | v27.89,184.78 U$12.1 24.13,183.46 C34.1
  Top 0.813: Q2.2 97.47,101.28 v97.16,101.6
  Bottom 0.305: 6.22,52.58 7.49,52.58
  Bottom 0.406: v26.54,194.06 26.8,194.06 27.05,193.8 | v27.89,184.78 28.45,184.78 28.57,184.66
  Bottom 0.813: v97.16,101.6 97.41,102.36
  other vias: 89.82,159.23
  pour Bottom (rank 2): -0.63,51.31 158.11,51.31 158.11,229.11 -0.63,229.11
  pour Bottom (no thermals): 31.62,213.11 41.78,213.11 41.78,204.72 31.62,204.72
  pour Bottom (no thermals): 114.94,219.2 125.09,219.2 125.09,210.82 114.94,210.82
  pour Bottom (no thermals): 114.68,170.18 124.84,170.18 124.84,161.8 114.68,161.8
  pour Bottom (no thermals): 6.48,214.12 18.67,214.12 18.67,209.04 6.48,209.04
  pour Bottom (no thermals): 6.73,171.7 18.92,171.7 18.92,166.62 6.73,166.62
  pour Bottom (no thermals): 6.73,155.96 18.92,155.96 18.92,150.88 6.73,150.88
  pour Bottom (no thermals): 6.99,139.19 19.18,139.19 19.18,134.11 6.99,134.11
  pour Bottom (no thermals): 6.99,122.68 19.18,122.68 19.18,117.6 6.99,117.6
  pour Bottom (no thermals): 6.99,122.68 19.18,122.68 19.18,117.6 6.99,117.6
  pour Bottom (no thermals): 6.48,105.92 18.67,105.92 18.67,100.84 6.48,100.84
  pour Bottom (no thermals): 6.48,105.92 18.67,105.92 18.67,100.84 6.48,100.84
  pour Bottom (no thermals): 7.24,89.41 19.43,89.41 19.43,84.33 7.24,84.33
  pour Bottom (no thermals): 7.24,72.9 19.43,72.9 19.43,67.82 7.24,67.82
  pour Bottom (no thermals): 72.77,170.94 82.93,170.94 82.93,162.56 72.77,162.56
  pour Bottom (no thermals): 88.52,80.01 109.6,80.01 109.6,58.93 88.52,58.93
  pour Bottom (no thermals): 65.66,158.5 79.12,154.69 79.12,119.13 63.12,119.13
  pour Bottom: -1.9,55.37 13.84,55.37 13.84,42.42 -1.9,42.42
GND1  (via drill 0.33, 0.6)
  Top 0.406: C53.2 78.61,44.2 v77.85,44.96 76.77,44.96 U$24.1 | R21.1 v49.91,41.15 | JP2.1 v48.9,46.99 | R17.2 61.09,45.47 v59.82,46.74 | R23.2 61.09,48.01 v59.82,46.74 | JP2.8 59.56,46.99 v59.82,46.74
  Bottom 0.406: U$23.2 50.16,39.88
  pour Bottom (rank 2): 41.53,39.12 90.81,39.12 90.81,62.48 40.51,62.48 40.51,40.13
I_ARRAY
  Top 0.406: JP2.2 51.73,46.01 50.67,44.96 48.64,44.96 48.26,44.57 U$23.3
INFO_LED
  Top 0.305: U$1.9 R1.1
JUMPER_SIG_IN
  Top 0.305: JP1.1 104.78,80.01 103.5,81.28 103.5,88.39 102.49,89.41 102.49,90.75 R2.1 102.3,97.72 99.19,100.84 99.19,102.36 99.44,102.62 101.47,102.62 102.24,103.38 U$1.10
LOGIC_POWER
  Top 0.406: JP2.3 52.73,45.74 51.44,44.45 51.44,39.62 51.94,39.12 F1.2
M1-IMEAS  (via drill 0.38)
  Top 0.305: 45.72,59.56 v46.04,59.25
  Top 0.406: U$14.7 45.72,59.56
  Bottom 0.305: v46.04,59.25 46.04,58.61 46.35,58.29 110.49,58.29 111.12,58.93 111.12,81.47 110.65,81.95 99.69,81.95 97.16,84.49 U$1.21
M1-SIG  (via drill 0.38)
  Top 0.305: 26.7,72.26 v26.67,72.26 2.54,72.26 1.91,71.63 1.91,56.39 3.18,55.12 113.66,55.12 114.3,55.75 114.3,79.72 111.28,82.74 108.9,85.15 U$1.25
  Bottom 0.305: U$6.4 v26.67,72.26
M2-IMEAS  (via drill 0.38)
  Top 0.406: U$15.7 45.72,75.91 v45.88,75.76
  Bottom 0.305: v45.88,75.76 5.4,75.76 4.45,74.8 4.45,58.93 5.71,57.66 111.12,57.66 111.76,58.29 111.76,81.79 110.97,82.58 102.08,82.58 99.69,84.96 U$1.22
M2-SIG  (via drill 0.38)
  Top 0.305: v26.67,88.77 1.91,88.77 1.27,88.14 1.27,55.75 2.54,54.48 114.3,54.48 114.94,55.12 114.94,81.63 109.85,86.71 U$1.26
  Bottom 0.305: U$7.4 v26.67,88.77
M3-IMEAS  (via drill 0.38)
  Top 0.305: v46.04,92.58 46.04,92.84 U$19.7
  Bottom 0.305: v46.04,92.58 4.45,92.58 3.81,91.95 3.81,58.29 5.08,57.02 111.76,57.02 112.4,57.66 112.4,82.26 111.44,83.22 103.82,83.22 102.24,84.8 U$1.23
M3-SIG  (via drill 0.38)
  Top 0.305: v26.67,105.28 1.27,105.28 0.64,104.65 0.64,55.12 1.91,53.85 114.94,53.85 115.57,54.48 115.57,83.53 112.4,86.71 U$1.27
  Bottom 0.305: U$8.4 v26.67,105.28
M4-IMEAS  (via drill 0.38)
  Top 0.305: U$18.7 45.88,109.51 v45.88,108.78
  Bottom 0.305: v45.88,108.78 4.13,108.78 3.18,107.82 3.18,57.66 4.45,56.39 112.4,56.39 113.03,57.02 113.03,82.58 111.76,83.85 106.2,83.85 104.78,85.28 U$1.24
M4-SIG  (via drill 0.38)
  Top 0.406: v26.67,121.79 4.6,121.79 3.33,123.06 3.33,190.53 5.71,192.91 27.94,192.91 33.66,187.2 67.63,187.2 86.52,206.09 86.68,206.09 87.5,206.09 115.06,206.09 116.81,204.34 116.81,147.35 114.59,145.13 95.57,145.13 93.98,143.54 93.98,109.86 94.36,109.47 96.14,109.47 97.16,108.46 122.24,108.46 122.56,108.14 U$1.2
  Bottom 0.406: v26.67,121.79 U$9.4
M5-IMEAS  (via drill 0.38)
  Top 0.305: v45.88,125.28 45.88,126.02 U$17.7
  Bottom 0.305: v45.88,125.28 2.86,125.28 2.54,124.97 2.54,57.02 3.81,55.75 113.03,55.75 113.66,56.39 113.66,82.42 114.94,83.69 U$1.28
M5-SIG  (via drill 0.38)
  Top 0.406: v26.67,138.4 26.66,138.3 4.76,138.3 4.13,138.94 4.13,190.21 6.03,192.12 27.62,192.12 33.34,186.4 68.1,186.4 87,205.3 114.74,205.3 116.01,204.03 116.01,147.67 114.27,145.92 95.25,145.92 93.03,143.7 93.03,109.03 93.34,108.71 95.82,108.71 96.87,107.66 114.3,107.66 114.94,107.03 U$1.5
  Bottom 0.406: U$10.4 v26.67,138.4
M6-IMEAS  (via drill 0.38)
  Top 0.305: 45.88,141.8 U$16.7 45.88,142.53 v45.88,141.64
  Bottom 0.305: v45.88,141.64 2.7,141.64 1.91,140.84 1.91,56.39 3.18,55.12 113.66,55.12 114.3,55.75 114.3,82.11 117.47,85.28 U$1.29
M6-SIG  (via drill 0.38)
  Top 0.406: v26.67,154.81 5.97,154.81 4.92,155.86 4.92,189.9 6.35,191.32 27.3,191.32 33.02,185.61 68.58,185.61 87.47,204.5 114.27,204.5 115.22,203.55 115.22,147.99 113.95,146.72 94.77,146.72 92.07,144.02 92.07,108.71 92.74,108.05 95.38,108.05 96.55,106.87 111.76,106.87 112.4,106.24 U$1.6
  Bottom 0.406: U$11.4 v26.67,154.81
N$1
  Top 0.406: U$14.6 44.45,58.42 C37.1
N$2
  Top 0.406: C38.1 44.4,74.15 U$15.6
N$3
  Top 0.406: R11.1 137.67,129.9 LED3.C
N$4
  Top 0.406: Q12.3 SIDEOUS-12V.2 111.76,198.72 109.31,201.17 PALPATINE-12V.2
N$5
  Top 0.406: R12.1 137.67,159.49 LED4.C
N$6
  Top 0.406: LED5.C 127.63,69.32 127.63,64.77 127.76,64.89 R13.1
N$7
  Top 0.406: 104.14,215.93 SIDEOUS-12V.8
  Top 7.62: 78.1,215.77 SIDEOUS-12V.8
  Bottom 0.406: C19.1 PALPATINE-12V.8 | SIDEOUS-12V.8 107.06,215.77 | 107.06,215.77 108.2,215.77 108.33,215.9 | C20.1 107.07,215.79 107.06,215.77
  pour Top (no thermals): 21.21,204.98 21.21,202.18 34.92,188.47 66.67,188.47 83.19,204.98 83.19,218.95 81.91,220.22 23.5,220.22 22.23,218.95 22.23,205.99
N$8
  Top 0.813: Q2.3 99.19,95.66 SG1.-
N$9
  Bottom 0.406: R7.2 102.55,114.33 DOOKU-12V-CRIT.4
N$10  (via drill 0.6)
  Top 0.406: 80.9,37.08 80.9,44.96 79.38,46.48 69.8,46.48 69.8,45.65 R14.1 69.62,47.67 LED14.A 69.6,47.75 69.57,47.78 | 69.49,47.81 69.57,47.78 | 69.57,47.78 69.88,47.67
  other vias: 74.8,31.75 76.07,31.75 74.8,30.48 76.07,30.48 74.8,29.21 76.07,29.21 74.8,26.67 76.07,26.67 74.8,25.4 76.07,25.4 76.07,13.97 74.8,13.97 74.8,11.43 74.8,12.7 76.07,12.7 76.07,11.43 76.07,8.89 76.07,7.62 74.8,7.62 74.8,8.89
  pour Top (rank 3, no thermals): 75.56,38.1 99.44,38.1 99.44,0 75.56,0 73.03,2.54 73.03,35.56
  pour Bottom (rank 3, no thermals): 75.56,38.1 99.44,38.1 99.44,0 75.56,0 73.03,2.54 73.03,35.56
N$11
  Top 0.305: LED13.A 112.14,80.77 109.09,83.82 106.81,83.82 106.04,84.58 106.04,90.68 104.78,91.95 R1.2
N$12
  Top 0.406: U$21.6 20.32,196.35 C43.1
N$14
  Top 0.305: U$3.Y 120.71,94.17 121.67,93.22 122.81,93.22 R6.2 124.75,93.09 126.68,91.15 126.68,90.04 128.27,88.45 131.13,88.45 U$4.1
N$15
  Top 0.406: IRLS3034-7P.1 73.28,6.35 73.03,6.6 73.03,24.13 | IRLS3034-7P.2.1 73.03,24.13 | 73.03,24.13 73.03,38.35 72.96,39.62 U$24.5
N$16
  Top 0.305: VADER-5V-EXT.6 VADER-5V-EXT.5
  Top 0.406: C11.1 126.62,140.72 125.98,141.35 | U$2.1 125.1,135.89 122.79,138.2
  Top 1.27: VADER-5V-EXT.6 122.79,138.2 125.74,141.1 125.98,141.35 126.11,141.48 C22.+ 126.11,146.05 127.63,147.57 131.7,147.57 132.72,148.59 132.72,151.32 Q4.1
N$17
  Top 0.406: C27.1 44.4,140.34 U$16.6
N$18
  Top 0.305: U$3.Z 122.43,96.39 R6.1 123.06,95.89 U$4.2
N$19
  Top 0.305: U$3.B 122.43,97.66 R5.2 125.98,95.12 U$4.6
N$20
  Top 0.305: U$3.A 120.71,99.88 121.67,100.84 122.81,100.84 R5.1 130.52,100.97 132.87,98.62 132.87,92.74 U$4.3
N$21
  Top 0.305: U$3.DI 118.49,96.39 119.13,97.03 119.13,101.09 120.01,101.98 U$1.3
N$22
  Top 0.406: C31.1 44.4,123.48 U$17.6
N$23
  Top 0.406: C35.1 44.4,106.97 U$18.6
N$24
  Top 0.406: C40.1 44.4,90.47 U$19.6
N$25
  Top 0.406: C42.1 44.4,156.7 U$20.6
N$28  (via drill 0.38)
  Bottom 0.406: v30.35,82.3 25.4,82.3 | 25.4,82.3 23.5,82.3 22.86,82.93 U$7.8 22.16,84.27 C24.2 | U$7.6 25.4,82.3
  pour Top (rank 2, no thermals): 29.84,87.88 41.02,87.88 44.77,84.07 44.77,79.5 40.77,75.44 29.84,75.44
N$29
  pour Top (no thermals): 8.26,78.23 8.26,80.26 9.78,81.79 26.54,81.79 28.07,80.26 28.07,78.23 26.54,76.71 9.78,76.71
N$30  (via drill 0.38)
  Top 0.406: Q7.1 v26.67,84.33
  Bottom 0.406: v26.67,84.33 U$7.5
N$31
  Top 0.406: R16.2 22.88,75.05 LED6.A
N$32  (via drill 0.6)
  Top 0.406: C53.1 78.87,39.88 78.3,39.31 U$24.8 76.71,41.53 76.07,42.16 74.04,42.16 | 74.04,42.16 70.23,42.16 | U$24.6 74.17,42.04 74.04,42.16 | 70.23,42.16 70.23,37.34 | 70.23,42.16 63.63,42.16 62.87,41.4 S1.1
  other vias: 60.83,24.13 62.1,30.48 60.83,31.75 65.91,29.21 63.37,31.75 64.64,27.94 65.91,26.67 67.18,25.4 68.45,26.67 63.37,24.13 64.64,25.4 67.18,27.94 68.45,31.75 65.91,31.75 64.64,30.48 67.18,30.48 60.83,29.21 68.45,29.21 62.1,25.4 68.45,24.13 63.37,26.67 65.91,24.13 62.1,27.94 63.37,29.21 60.83,26.67 62.36,12.7 61.09,11.43 63.63,8.89 61.09,6.35 62.36,7.62 64.9,10.16 63.63,13.97 64.9,12.7 67.44,12.7 61.09,13.97 61.09,8.89 62.36,10.16 64.9,7.62 67.44,7.62 68.71,8.89 63.63,6.35 66.17,6.35 66.17,8.89 68.71,6.35 63.63,11.43 66.17,11.43 68.71,11.43 67.44,10.16 66.17,13.97 68.71,13.97
  pour Top (no thermals): 50.67,36.83 51.94,38.1 69.98,38.1 70.99,37.08 70.99,1.27 69.98,0.25 52.7,0.25 50.67,2.29
  pour Bottom (rank 3, no thermals): 52.7,0.25 69.98,0.25 70.99,1.27 70.99,37.08 69.98,38.1 51.94,38.1 50.67,36.83 50.67,2.29
N$33
  pour Top (rank 4, no thermals): 15.62,38.1 15.88,0 47.62,0 50.16,2.54 50.16,36.58 48.64,38.1
  pour Bottom (rank 4, no thermals): 15.88,0 15.62,38.1 48.64,38.1 50.16,36.58 50.16,2.54 47.62,0
N$34
  Top 0.406: 55.12,41.78 55.24,41.4 55.24,41.05 R19.2 55.63,41.13 F1.1 55.5,38.99 55.5,38.86 64.39,38.86 65.41,39.88 S1.2
N$35
  Bottom 0.406: R8.2 102.55,139.92 VADER-5V-EXT.4
N$36
  Top 0.406: DOOKU-12V-CRIT.5 DOOKU-12V-CRIT.6 | 125.86,113.97 128.14,113.72 | U$5.1 125.09,111 124.08,112.01 | C21.+ 125.86,125.73 C9.1
  Top 1.27: DOOKU-12V-CRIT.6 123.7,111.64 124.08,112.01 125.79,113.72 128.14,113.72 Q5.4 | C21.+ 125.86,113.97
N$37
  Top 0.406: LED14.C R23.1
N$39
  Top 0.406: R9.2 22.88,58.54 LED1.A
N$40  (via drill 0.38)
  Bottom 0.406: v30.35,65.79 25.53,65.79 | 25.53,65.79 23.5,65.79 22.86,66.42 U$6.8 22.16,67.76 C16.2 | U$6.6 25.4,65.91 25.53,65.79
  pour Top (rank 3, no thermals): 29.84,71.63 41.02,71.63 44.83,67.82 44.83,63.25 40.77,59.18 29.84,59.18
N$41
  pour Top (no thermals): 8.26,61.72 8.26,63.75 9.78,65.28 26.54,65.28 28.07,63.75 28.07,61.72 26.54,60.2 9.78,60.2
N$42  (via drill 0.38)
  Top 0.406: Q6.1 v26.67,67.82
  Bottom 0.406: U$6.5 v26.67,67.82
N$44  (via drill 0.38)
  Bottom 0.406: v30.35,98.81 25.4,98.81 | 25.4,98.81 23.5,98.81 22.86,99.44 U$8.8 22.16,100.78 C26.2 | U$8.6 25.4,98.81
  pour Top (rank 3, no thermals): 29.84,104.39 41.02,104.39 44.83,100.58 44.83,96.01 40.77,91.95 29.84,91.95
N$45
  pour Top (no thermals): 8.26,94.74 8.26,96.77 9.78,98.3 26.54,98.3 28.07,96.77 28.07,94.74 26.54,93.22 9.78,93.22
N$46
  Top 0.406: LED2.A R10.2
N$47  (via drill 0.38)
  Top 0.406: Q9.1 v26.67,100.84
  Bottom 0.406: U$8.5 v26.67,100.84
N$49
  Top 0.406: R18.2 22.88,91.56 LED7.A
N$54  (via drill 0.38)
  Bottom 0.406: v30.35,115.32 25.4,115.32 | 25.4,115.32 23.5,115.32 22.86,115.95 U$9.8 22.16,117.29 C28.2 | U$9.6 25.4,115.32
  pour Top (rank 3, no thermals): 29.84,120.9 41.02,120.9 44.83,117.09 44.83,112.52 40.77,108.46 29.84,108.46
N$56  (via drill 0.38)
  Top 0.406: Q11.1 v26.67,117.35
  Bottom 0.406: U$9.5 v26.67,117.35
N$57
  Top 0.406: R20.2 22.88,108.07 LED8.A
N$60  (via drill 0.38)
  Bottom 0.406: v30.35,131.83 25.53,131.83 | 25.53,131.83 23.5,131.83 22.86,132.46 U$10.8 22.16,133.8 C30.2 | U$10.6 25.4,131.95 25.53,131.83
  pour Top (rank 3, no thermals): 29.84,137.41 41.02,137.41 44.83,133.6 44.83,129.03 40.77,124.97 29.84,124.97
N$61
  pour Top (no thermals): 8.26,127.76 8.26,129.79 9.78,131.32 26.54,131.32 28.07,129.79 28.07,127.76 26.54,126.24 9.78,126.24
N$62  (via drill 0.38)
  Top 0.406: Q14.1 v26.67,133.86
  Bottom 0.406: U$10.5 v26.67,133.86
N$63
  Top 0.406: R22.2 22.88,124.58 LED9.A
N$66  (via drill 0.38)
  Bottom 0.406: v30.35,148.34 25.27,148.34 | 25.27,148.34 23.5,148.34 22.86,148.97 U$11.8 22.16,150.31 C32.2 | U$11.6 25.4,148.46 25.27,148.34
  pour Top (rank 3, no thermals): 29.84,153.92 41.12,153.92 44.83,150.15 44.83,145.54 40.77,141.48 29.84,141.48
N$67
  pour Top (no thermals): 8.26,144.27 8.26,146.3 9.78,147.83 26.54,147.83 28.07,146.3 28.07,144.27 26.54,142.75 9.78,142.75
N$68  (via drill 0.38)
  Top 0.406: Q16.1 v26.67,150.37
  Bottom 0.406: U$11.5 v26.67,150.37
N$69
  Top 0.406: R24.2 22.88,141.09 LED10.A
N$72
  Top 0.406: U$12.6 18.8,187.32 18.41,186.94 18.41,185.17 18.8,184.78 U$12.8 21.59,183.46 C34.2 21.46,183.08 21.46,178.31 22.4,177.37 Q18.2
  Top 1.27: Q18.2 Q18.4 32.6,179.64 Q1.4
N$73
  Top 1.27: ARM_P.R 10.14,177.17 R26.1 19.3,177.17 21.4,175.07 Q18.3
N$74
  Top 0.406: Q18.1 23.15,179.67 22.86,179.96 22.86,187.58 21.84,188.6 U$12.5
N$75
  Top 0.406: LED11.A 14.1,174.37 R26.2
N$78  (via drill 0.38)
  Bottom 0.406: v30.35,164.85 25.53,164.85 | 25.53,164.85 23.5,164.85 22.86,165.48 U$13.8 22.16,166.82 C36.2 | U$13.6 25.4,164.97 25.53,164.85
  pour Top (rank 3, no thermals): 29.84,170.43 41.02,170.43 44.83,166.62 44.83,162.05 40.77,157.99 29.84,157.99
N$79
  pour Top (no thermals): 8.26,160.78 8.26,162.81 9.78,164.34 26.54,164.34 28.07,162.81 28.07,160.78 26.54,159.26 9.78,159.26
N$80  (via drill 0.38)
  Top 0.406: Q20.1 v26.67,166.88
  Bottom 0.406: U$13.5 v26.67,166.88
N$81
  Top 0.406: R28.2 22.88,157.6 LED12.A
N$100
  Top 0.406: 127.96,77.78 C17.1 128.96,77.8 L3.1
  Top 1.016: OKI-78SR-5/1.5-W36H.3 L3.1
N$114
  Top 0.305: R15.1 111.25,159.26 111.25,160.55 Q12.1
PRIMARY-VMEAS
  Top 0.406: R3.1 R4.2 90.3,83.16 92.07,84.96 U$1.19
RXD
  Top 0.305: U$3.RO 117.22,97.66 118.36,98.81 118.36,101.09 117.47,101.98 U$1.4
U
  pour Top (no thermals): 8.26,111.25 8.26,113.28 9.78,114.81 26.54,114.81 28.07,113.28 28.07,111.25 26.54,109.73 9.78,109.73
V_BATT
  Top 0.406: R3.2 87.45,79.76 84.46,79.76 84.2,80.01
  Top 1.27: Q1.1 48.84,179.64 51.44,177.04
  Bottom 0.406: C13.2 VADER-5V-EXT.2 90.22,137.04 C15.2 | C10.2 DOOKU-12V-CRIT.2 C14.2
  pour Top (rank 2, no thermals): 45.09,168.15 45.09,161.8 50.16,161.8 50.16,151.64 45.09,151.64 45.09,145.29 50.16,145.29 50.16,135.13 45.09,135.13 45.09,128.78 50.16,128.78 50.16,118.62 45.09,118.62 45.09,112.27 50.16,112.27 50.16,102.11 45.09,102.11 45.09,95.76 50.16,95.76 50.16,85.6 45.4,85.6 45.4,79.25 50.16,79.25 50.16,69.09 45.09,69.09 45.09,62.74 50.16,62.74 55.34,55.63 85.72,55.63 85.72,160.53 86.36,160.53 86.36,178.31 50.16,178.31 50.16,168.15
  pour Top (no thermals): 83.38,175.77 89.53,175.77 89.53,194.31 88.26,195.58 85.72,195.58 84.46,194.31 84.46,179.58 83.38,178.31
  pour Top (no thermals): 89.53,170.37 89.53,176.72 85.72,175.77 85.72,160.53 85.57,159.26 88.11,161.8 104.65,161.8 106.04,163.19 106.04,166.88 104.78,168.15 92.07,168.15 92.07,168.23
  pour Top: 85.22,138.94 88.52,138.94 88.52,135.13 85.22,135.13
  pour Top: 84.96,113.54 88.26,113.54 88.26,109.73 84.96,109.73
V_CHECK
  Top 0.406: R19.1 R21.2 52.45,43.33 52.45,44.45 53.73,45.73 JP2.4
V_OUT
  Top 0.406: R14.2 R17.1 64.54,44.86 63.63,43.94 58.29,43.94 56.77,45.47 56.77,46.44 JP2.7

## Text on the board
Top: HORIZON / 2015 | Missouri S&T Mars Rover Design Team | ROVE DOWN FOR WHAT
tStop: Jake Armenta | HORIZON / 2015 | Missouri S&T Mars Rover Design Team
_tPlace: PALPATINE-12V | ARM_P | SIDEOUS-12V | 5V-EXT | U$2 | 12V-CRIT | U$5 | 5V-INT
_tNames: C51 | C52 | C50 | C49 | C45 | C46 | U$21 | LED2 | R10 | C43 | C6 | 12V-AUX | U$12 | C34 | Q1 | LED11 | R26 | C44 | Q18 | Q20 | D1 | AUX_P | U$20 | Q12 | R28 | R12 | LED4 | LED12 | VADER-5V-EXT | R15 | C12 | C42 | C41 | Q16 | Q4 | MOTOR_6 | U$16 | C22 | R24 | LED10 | C27 | C11 | Q14 | C25 | DOOKU-12V-CRIT | MOTOR_5 | U$17 | R11 | R22 | C9 | LED3 | LED9 | C21 | C31 | C29 | Q11 | C8 | MOTOR_4 | U$18 | Q5 | R20 | LED8 | C48 | C35 | Q9 | C33 | R1 | C47 | R5 | MOTOR_3 | Q2 | C7 | U$19 | R6 | R18 | LED7 | R2 | C40 | C39 | Q7 | MOTOR_2 | R3 | JP1 | U$15 | R4 | C18 | R16 | C17 | LED6 | LED13 | L3 | C38 | Q6 | C23 | LED5 | MOTOR_1 | R13 | U$14 | D2 | R9 | LED1 | C5 | C37 | R1 | JP1 | SJ1 | LED1 | R6 | R5 | R4 | R3 | C22 | IRLS3034-7P
_bNames: C20 | C19 | U$13 | C36 | C32 | U$11 | U$10 | C15 | R8 | C30 | C13 | C28 | U$9 | R7 | C10 | C14 | U$8 | C26 | U$7 | C24 | U$6 | C16